# Altium PCB PCB1.PcbDoc
Units mm, origin at the board's own origin, x right, y up, seen from the top; angles counter-clockwise.
Board outline 78.99 x 58.8 mm, 2 copper layers (Top Layer, Bottom Layer); 62 components, 42 nets, 212 pads, 35 vias.
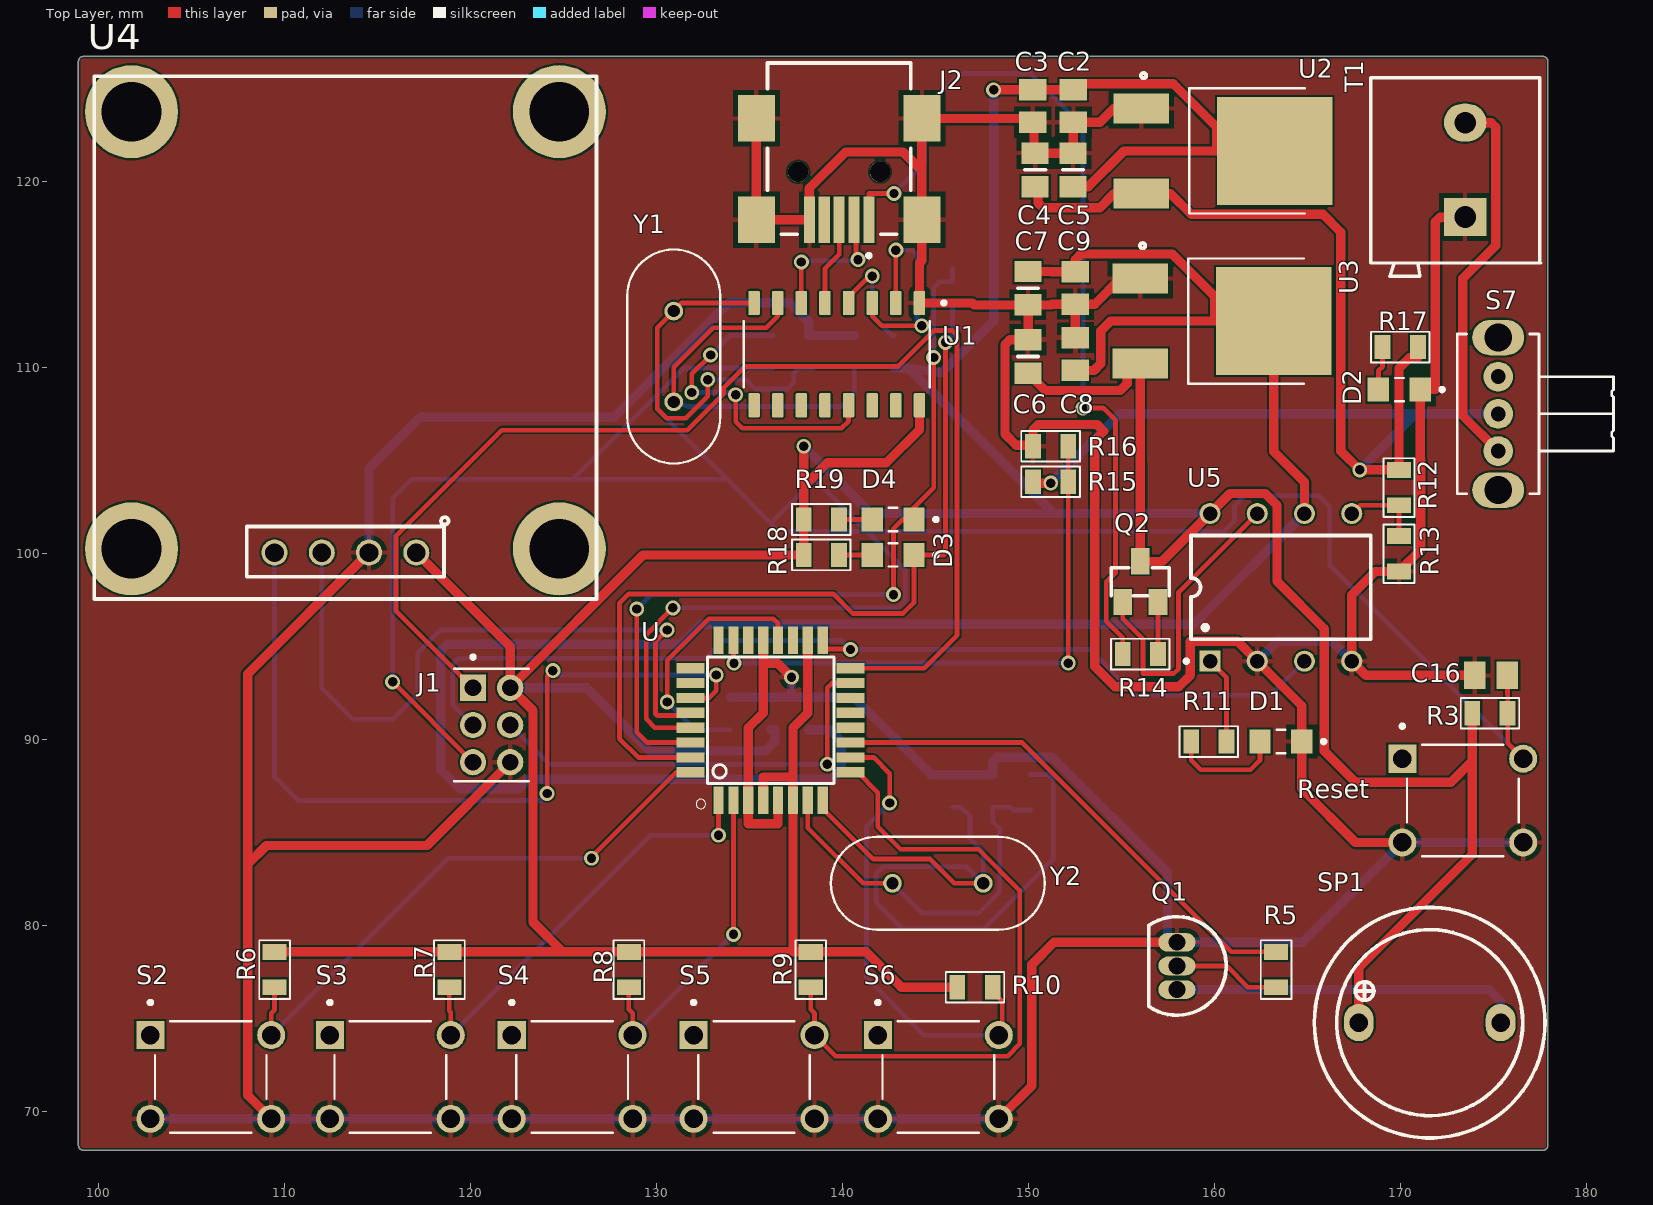
[diagram p0: Top Layer view]
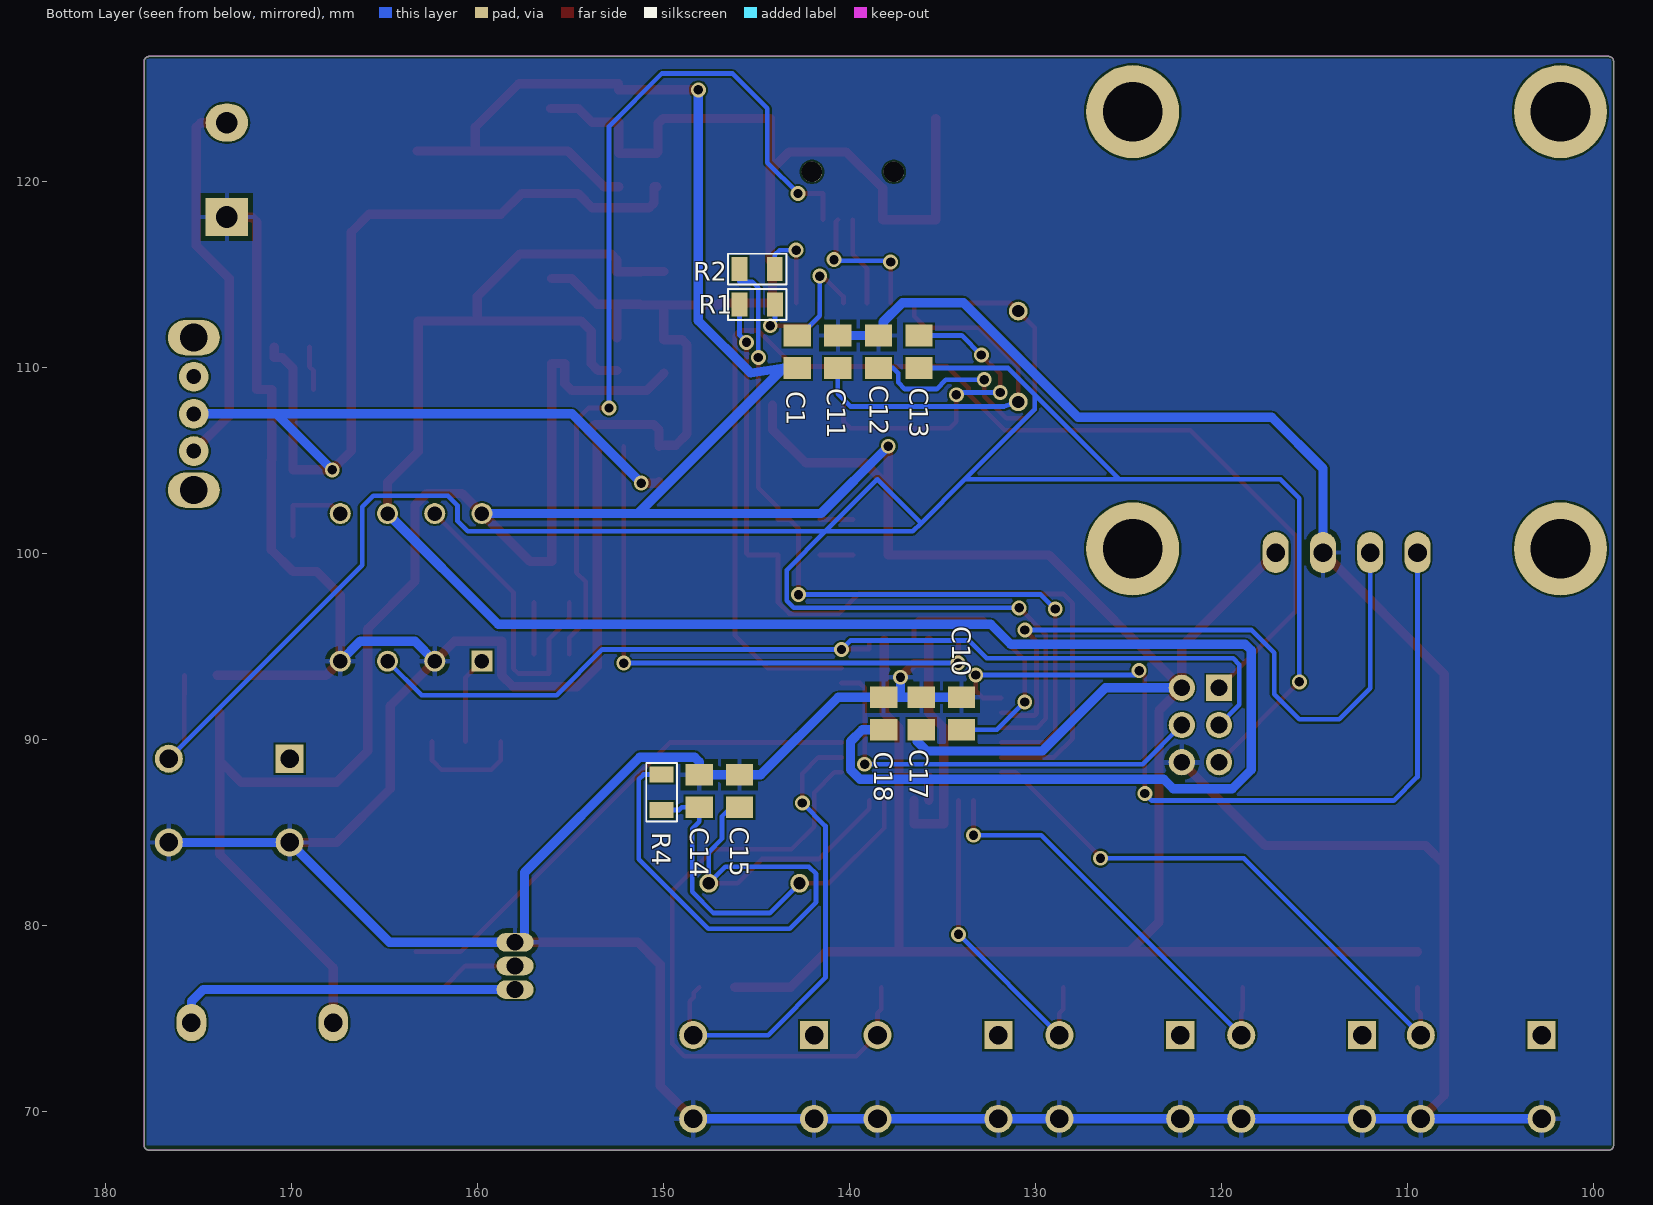
[diagram p1: Bottom Layer view, seen from below]

## Layer stack, top to bottom
Top Solder: solder mask 0.0102, Solder Resist, Dk 3.5
Top Layer: signal copper 0.0356
Dielectric 1: dielectric 0.32, FR-4, Dk 4.8
Bottom Layer: signal copper 0.0356
Bottom Solder: solder mask 0.0102, Solder Resist, Dk 3.5

## Board outline
98.933,68.199 ccw(c99.187,68.199) 99.187,67.945 177.673,67.945 ccw(c177.673,68.199) 177.927,68.199 177.927,126.492 ccw(c177.673,126.492) 177.673,126.746 99.187,126.746 ccw(c99.187,126.492) 98.933,126.492

## Design rules (kind name [scope] priority, off if disabled: settings)
Clearance [All] p1: gap=0.1 ignorepadtopadclearanceinfootprint=FALSE except(0.25: Arc-Arc Arc-Track Arc-SMDPad Arc-THPad Track-Track Track-SMDPad Track-THPad)
PolygonConnect [All] p1: connectstyle=Relief reliefconductorwidth=0.254 reliefentries=4 polygonreliefangle="90 Angle" airgapwidth=0.254
RoutingVias [All] p1: holewidth=0.5 width=0.8 viastyle="Through Hole" minholewidth=0.4 minwidth=0.7 maxholewidth=0.7 maxwidth=1
SolderMaskExpansion [All] p1: expansion=0.102 istentingtop=FALSE
Width "Schematic Width Constraint_5" [InNet('3.3V')] p1: maxlimit=0.6 minlimit=0.4 preferedwidth=0.5
Width "Schematic Width Constraint_4" [InNet('NetS7_1')] p2: maxlimit=0.6 minlimit=0.4 preferedwidth=0.5
Width "Schematic Width Constraint_3" [InNet('5V')] p3: maxlimit=0.6 minlimit=0.4 preferedwidth=0.5
Width "Schematic Width Constraint_2" [InNet('GND')] p4: maxlimit=0.6 minlimit=0.4 preferedwidth=0.5
Width "Schematic Width Constraint_1" [InNet('12V')] p5: maxlimit=0.6 minlimit=0.4 preferedwidth=0.5
Width "Schematic Width Constraint" [InNet('NetQ1_2')] p6: maxlimit=0.6 minlimit=0.4 preferedwidth=0.5
Width [All] p7: maxlimit=0.254 minlimit=0.254 preferedwidth=0.254
30 further rules are at their usual default settings.

## Classes and differential pairs
component class Power_sch: C2 C3 C4 C5 C6 C7 C8 C9 C17 C18 D1 D2 Q2 R11 R12 R13 R14 R15 R16 R17 S7 T1 U2 U3 U5
component class microcontroller_sch: C1 C10 C11 C12 C13 C14 C15 C16 D3 D4 J1 J2 Q1 R1 R2 R3 R4 R5 R6 R7 R8 R9 R10 R18 R19 Reset S2 S3 S4 S5 S6 SP1 U U1 U4 Y1 Y2

## Components (designator, comment, footprint, x,y, rotation, side; value= is the part's Value field where it differs from the comment)
C1 "100n@805" CAPC2012X95N 142.815,110.871 r270 bottom
C2 "100n@805" CAPC2012X95N 152.422,124.079 r90 top
C3 "100n@805" CAPC2012X95N 150.241,124.079 r90 top
C4 "47uF@tan size2" CAPC2012X140N 150.368,120.65 r90 top
C5 "47uF@tan size2" CAPC2012X140N 152.4,120.65 r90 top
C6 "47uF@tan size2" CAPC2012X140N 149.987,110.617 r90 top
C7 "47uF@tan size2" CAPC2012X140N 149.987,114.289 r270 top
C8 "100n@805" CAPC2012X95N 152.527,110.744 r270 top
C9 "100n@805" CAPC2012X95N 152.527,114.3 r90 top
C10 "100n@805" CAPC2012X95N 133.985,91.426 r270 bottom
C11 "22p@805" CAPC2012X95N 140.633,110.871 r270 bottom
C12 "22p@805" CAPC2012X95N 138.452,110.871 r270 bottom
C13 "100n@805" CAPC2012X95N 136.271,110.871 r270 bottom
C14 "22p@805" CAPC2012X95N 148.092,87.256 r270 bottom
C15 "22p@805" CAPC2012X95N 145.923,87.263 r270 bottom
C16 "100n@805" CAPC2012X95N 174.879,93.472 r0 top
C17 "100n@805" CAPC2012X95N 136.144,91.426 r270 bottom
C18 "100n@805" CAPC2012X95N 138.176,91.426 r270 bottom
D1 "7012X1" LED_7012X1 163.576,89.916 r180 top
D2 "7012X1" LED_7012X1 169.944,108.839 r180 top
D3 "7012X1" LED_7012X1 142.73,99.949 r180 top
D4 "7012X1" LED_7012X1 142.73,101.854 r180 top
J1 "57102-F10-03LF" AMPHENOL_57102-F10-03LF 121.142,90.805 r90 top
J2 "MUSB-05-X-B-SM-A-R-K-TR" SAMTEC_MUSB-05-X-B-SM-A-R-K-TR 139.827,121.793 r180 top
Q1 "2N2222" "2n2222 TO92" 155.829,83.947 r270 top
Q2 "MS23P01S" "IRF640N TO-220AB" 164.15,91.397 r90 top
R1 "1K" RES0805 148.655,111.098 r180 bottom
R2 "1K" RES0805 148.66,113.003 r180 bottom
R3 "10K" RES0805 178.505,93.753 r180 top
R4 "1M" RES0805 152.427,90.875 r270 bottom
R5 "1K" RES0805 165.635,73.971 r90 top
R6 "10K" RES0805 111.787,73.971 r90 top
R7 "10K" RES0805 121.185,73.971 r90 top
R8 "10K" RES0805 130.837,73.971 r90 top
R9 "10K" RES0805 140.616,73.971 r90 top
R10 "10K" RES0805 150.819,79.021 r180 top
R11 "1K" RES0805 156.018,87.603 r0 top
R12 "10K" RES0805 172.239,99.884 r90 top
R13 "10K" RES0805 172.239,96.323 r90 top
R14 "1K" RES0805 152.335,92.302 r0 top
R15 "2.2K" RES0805 154.883,106.199 r180 top
R16 "10K" RES0805 147.509,103.478 r0 top
R17 "1K" RES0805 166.305,108.812 r0 top
R18 "1K" RES0805 142.559,102.262 r180 top
R19 "1K" RES0805 142.559,104.167 r180 top
Reset "Reset" SW_TS02-66-95-BK-260-LCR-D 173.355,86.741 r0 top
S2 "TS02-66-95-BK-260-LCR-D" SW_TS02-66-95-BK-260-LCR-D 106.045,71.882 r0 top
S3 "TS02-66-95-BK-260-LCR-D" SW_TS02-66-95-BK-260-LCR-D 115.697,71.882 r0 top
S4 "TS02-66-95-BK-260-LCR-D" SW_TS02-66-95-BK-260-LCR-D 125.476,71.882 r0 top
S5 "TS02-66-95-BK-260-LCR-D" SW_TS02-66-95-BK-260-LCR-D 135.255,71.882 r0 top
S6 "TS02-66-95-BK-260-LCR-D" SW_TS02-66-95-BK-260-LCR-D 145.161,71.882 r0 top
S7 "Subminiator SPDT switch" "Subminiator SPDT switch" 155.445,145.685 r270 top
SP1 "BUZZER" "BUZZER 7.62 mm DC" 171.323,74.041 r0 top
T1 "2Pin_Terminal" 2Pin_Terminal 181.864,87.884 r90 top
U "ATMEGA328P-AN" QFP80P900X900X120-32N 136.144,91.059 r90 top
U1 "CH340G" SOIC127P600X180-16N 139.7,110.744 r270 top
U2 "NCP1117DT5" VREG_NCP1117DT33 160.147,121.666 r270 top
U3 "NCP1117DT33" VREG_NCP1117DT33 160.095,112.522 r270 top
U4 "OLED SSD1306 I2C" OLED_SSD1306_64_I2C 113.284,100.076 r180 top
U5 "LM358 DIP" "LM358 DIP" 163.576,98.204 r90 top
Y1 "12 MHZ" XTAL_HC49P488W46L1150T500H350 130.937,110.617 r90 top
Y2 "16 MHZ" XTAL_HC49P488W46L1150T500H350 145.134,82.296 r0 top

## Footprints (in the part's own frame and the unit in brackets; to place one, negate y for a bottom-side part, rotate by r counter-clockwise, add the part's x,y. Pads: shape width x height; smd on the part's side, far side on the other; paste and mask are expansions set on the pad)
"2n2222 TO92" [mm]
  oval 1x2 hole 0.9: 1(6.096,2.159) 2(7.366,2.159) 3(4.826,2.159)
  silkscreen extent 3.45,0.64 8.74,4.81, body extent 3.82,0.61 8.38,4.45, height 10.44
2Pin_Terminal [mil]
  rect 80x90 hole 46: 1(1190,330)
  oval 80x90 hole 46: 2(1390,330)
  silkscreen extent 1065,170 1485,530, body extent 1063,173 1485,530, height 493
AMPHENOL_57102-F10-03LF [mm]
  rect 1.408x1.408 hole 0.9: 01(2,1)
  round 1.408 hole 0.9: 02(2,-1) 03(0,1) 04(0,-1) 05(-2,1) 06(-2,-1)
  silkscreen extent -3.02,-2 3.75,2, body extent -3,-2 3,2, height 7.5
"BUZZER 7.62 mm DC" [mm]
  oval 1.6x2 hole 1: 1(-3.556,0.762) 2(4.064,0.762)
  silkscreen extent -5.95,-5.43 6.45,6.96, body extent -5.75,-5.23 6.25,6.76, height 9.5
CAPC2012X95N [mm]
  rect 1.16x1.47 smd: 1(-0.875,0) 2(0.875,0)
  body extent -1,-0.63 1,0.63, height 1.45
CAPC2012X140N [mm]
  rect 1.15x1.45 smd: 1(-0.9,0) 2(0.9,0)
  silkscreen extent 0,-0.55 0,0.55, body extent -1.02,-0.65 1.02,0.65, height 1.2
"IRF640N TO-220AB" [mm]
  rect 1.4x1 smd paste+0 mask+0: 1(6.012,9.078) 2(6.012,7.178) 3(8.212,8.128)
  silkscreen extent 6.35,6.57 7.86,9.69, body extent 5.21,6.47 9.01,9.79, height 0.25
LED_7012X1 [mm]
  rect 1.15x1.3 smd: A(1.125,0) C(-1.125,0)
  silkscreen extent -2.4,-0.62 0.23,0.62, body extent -1,-0.62 1,0.62, height 0.73
"LM358 DIP" [mm]
  rect 1.13x1.13 hole 0.78: 1(-3.97,3.81)
  round 1.13 hole 0.78: 2(-3.97,1.27) 3(-3.97,-1.27) 4(-3.97,-3.81) 5(3.97,-3.81) 6(3.97,-1.27) 7(3.97,1.27) 8(3.97,3.81)
  silkscreen extent -4.07,-4.83 2.79,5.18, body extent -3.94,-4.7 3.94,4.7, height 4.36
OLED_SSD1306_64_I2C [mm] "OLED SS1306 Breakout, 128X64, I2C (Make www.pcblearn.com)"
  round 1.4 / inner round 1.4 / far side oval 1.4x2.2 hole 1 mask+0.1: 1(-3.81,0) 2(-1.27,0) 3(1.27,0) 4(3.81,0)
  round 5 hole 3.2: ""(-11.5,-0.2) ""(-11.5,-23.7) ""(11.5,-0.2) ""(11.5,-23.7)
  silkscreen extent -13.5,-25.6 13.5,2.5, body extent -13.37,-25.49 13.34,2.37, height 11.47
QFP80P900X900X120-32N [mm]
  rect 1.5x0.55 smd: 1(-4.3,2.8) 2(-4.3,2) 3(-4.3,1.2) 4(-4.3,0.4) 5(-4.3,-0.4) 6(-4.3,-1.2) 7(-4.3,-2) 8(-4.3,-2.8) 17(4.3,-2.8) 18(4.3,-2) 19(4.3,-1.2) 20(4.3,-0.4) 21(4.3,0.4) 22(4.3,1.2) 23(4.3,2) 24(4.3,2.8)
  rect 0.55x1.5 smd: 9(-2.8,-4.3) 10(-2,-4.3) 11(-1.2,-4.3) 12(-0.4,-4.3) 13(0.4,-4.3) 14(1.2,-4.3) 15(2,-4.3) 16(2.8,-4.3) 25(2.8,4.3) 26(2,4.3) 27(1.2,4.3) 28(0.4,4.3) 29(-0.4,4.3) 30(-1.2,4.3) 31(-2,4.3) 32(-2.8,4.3)
  silkscreen extent -4.75,-3.4 3.4,4, body extent -4.5,-4.5 4.5,4.5, height 1.2
RES0805 [mm]
  rect 0.85x1.3 smd: 1(2.737,2.313) 2(4.637,2.313)
  silkscreen extent 2.11,1.49 5.26,3.14, body extent 2.66,1.66 4.71,2.96, height 0.5
SAMTEC_MUSB-05-X-B-SM-A-R-K-TR [mm]
  rect 0.6x2.5 smd: 1(-1.6,3.83) 2(-0.8,3.83) 3(0,3.83) 4(0.8,3.83) 5(1.6,3.83)
  rect 2x2.5 smd: SH1(-4.45,3.83) SH2(4.45,3.83) SH3(-4.45,-1.62) SH4(4.45,-1.62)
  round 1.1 hole 1.1 unplated: ""(-2.2,1.25) ""(2.2,1.25)
  silkscreen extent -3.85,-4.6 3.85,5.85, body extent -5,-4.6 5,4.9, height 4.13
SOIC127P600X180-16N [mm]
  rrect25% 1.31x0.62 smd: 1(-2.75,4.445) 2(-2.75,3.175) 3(-2.75,1.905) 4(-2.75,0.635) 5(-2.75,-0.635) 6(-2.75,-1.905) 7(-2.75,-3.175) 8(-2.75,-4.445) 9(2.75,-4.445) 10(2.75,-3.175) 11(2.75,-1.905) 12(2.75,-0.635) 13(2.75,0.635) 14(2.75,1.905) 15(2.75,3.175) 16(2.75,4.445)
  silkscreen extent -2.85,-5 1.78,5.85, body extent -3,-5 3,5, height 1.8
"Subminiator SPDT switch" [mm]
  round 1.6 hole 0.8: 1(40.152,19.815) 2(38.152,19.815) 3(36.152,19.815)
  oval 1.9x2.8 hole 1.5: M2(34.052,19.815) M2(42.252,19.815)
  silkscreen extent 33.85,17.62 42.45,26.01, body extent 33.84,17.54 42.45,25.91, height 4.7
SW_TS02-66-95-BK-260-LCR-D [mm]
  rect 1.508x1.508 / inner round 1.508 / far side rect 1.508x1.508 hole 1: 1(-3.25,2.25)
  round 1.508 hole 1: 2(3.25,2.25) 3(-3.25,-2.25) 4(3.25,-2.25)
  silkscreen extent -3.35,-3 3,4.1, body extent -3.95,-3 3.94,3, height 9.7
VREG_NCP1117DT33 [mm]
  rect 1.6x3 smd: 1(-2.285,-4.08) 3(2.285,-4.08)
  rect 5.8x6.2 smd: 4(0,3.1)
  silkscreen extent -4.19,-4.09 3.36,4.72, body extent -3.12,-4.7 3.38,5.21, height 2.39
XTAL_HC49P488W46L1150T500H350 [mm]
  round 1.007 hole 0.657: 1(-2.44,0) 2(2.44,0)
  silkscreen extent -5.75,-2.5 5.75,2.5, body extent -5.66,-2.5 5.84,2.5, height 3.25

## Part data
C1 C2 C3 C8 C9 C10 C11 C12 C13 C14 C15 C16 C17 C18: library part AC0805KPX7R9BB103, "Multilayer Ceramic Capacitors MLCC - SMD/SMT 50Vol 0.01uF X7R 805 10% AEC-Q200", Package="0805 Yageo", Check_prices=https://www.snapeda.com/parts/AC0805KPX7R9BB103/Yageo/view-part/?ref=eda, MF=YAGEO, MP=AC0805KPX7R9BB103, SnapEDA_Link=https://www.snapeda.com/parts/AC0805KPX7R9BB103/Yageo/view-part/?ref=snap
C4 C5 C6 C7: library part TLJR476M010S3200, "Tantalum Capacitors", Package="0805 AVX", Availability=Unavailable, Check_prices=https://www.snapeda.com/parts/TLJR476M010S3200/AVX/view-part/1709907/?ref=eda, MF=AVX, MP=TLJR476M010S3200, Price=None, SnapEDA_Link=https://www.snapeda.com/parts/TLJR476M010S3200/AVX/view-part/1709907/?ref=snap
D1 D2 D3 D4: "Red - LED Indication - Discrete 1.7V 0805 (2012 Metric)", Package="0805 Visual Communications", Availability="In Stock", Check_prices=https://www.snapeda.com/parts/7012X1/Visual+Communications/view-part/?ref=eda, MF=VCC, MP=7012X1, Price=None, Purchase-URL=https://pricing.snapeda.com/search/part/7012X1/?ref=eda, SnapEDA_Link=https://www.snapeda.com/parts/7012X1/Visual+Communications/view-part/?ref=snap
J1: "Header, Through Hole, Double row, 6, 2mm (0.079in), Vertical", Package=None, Availability="In Stock", Check_prices=https://www.snapeda.com/parts/57102-F10-03LF/Amphenol+FCI/view-part/?ref=eda, MF="Amphenol ICC (FCI)", MP=57102-F10-03LF, Price=None, Purchase-URL=https://pricing.snapeda.com/search/part/57102-F10-03LF/?ref=eda, SnapEDA_Link=https://www.snapeda.com/parts/57102-F10-03LF/Amphenol+FCI/view-part/?ref=snap
J2: "USB - mini B USB 2.0 Receptacle Connector 5 Position Surface Mount, Right Angle", Package=None, Check_prices=https://www.snapeda.com/parts/MUSB-05-F-B-SM-A-R-K-TR/Samtec/view-part/?ref=eda, MF=Samtec, MP=MUSB-05-F-B-SM-A-R-K-TR, SnapEDA_Link=https://www.snapeda.com/parts/MUSB-05-F-B-SM-A-R-K-TR/Samtec/view-part/?ref=snap
Q1: "npn"
Q2: library part IRF640N
R1 R2 R3 R4 R5 R6 R7 R8 R9 R10 R11 R12 R13 R15 R16 R17 R18 R19: library part RES0805, "RES0805"
R14: library part RES1206, "RES1206"
Reset: library part TS02-66-95-BK-260-LCR-D, Package=None, Availability=Unavailable, MP=TS02-66-95-BK-260-LCR-D, Price=None
S2 S3 S4 S5 S6: Package=None, Availability=Unavailable, MP=TS02-66-95-BK-260-LCR-D, Price=None
U: "AVR AVRÂ® ATmega Microcontroller IC 8-Bit 20MHz 32KB _16K x 16_ FLASH 32-TQFP _7x7_", Package="TQFP-32 Microchip", Availability=Unavailable, MF=Microchip, MP=ATMEGA328P-AN, Price=None, SnapEDA_Link=https://www.snapeda.com/parts/ATMEGA328P-AN/Microchip/view-part/1227245/?ref=snap
U1: "USB Interface Integrated Circuit", Package=None, Availability="Not in stock", Check_prices=https://www.snapeda.com/parts/Ch340G/WCH/view-part/?ref=eda, MF=WCH, MP=Ch340G, Price=None, SnapEDA_Link=https://www.snapeda.com/parts/Ch340G/WCH/view-part/?ref=snap
U2: library part NCP1117DT33, "Linear Voltage Regulator IC Positive Fixed 1 Output 1A DPAK", Package="DPAK-3 ON Semiconductor", Availability="In Stock", Check_prices=https://www.snapeda.com/parts/NCP1117DT33/Onsemi/view-part/?ref=eda, MF="ON Semiconductor", MP=NCP1117DT33, Price=None, Purchase-URL=https://pricing.snapeda.com/search/part/NCP1117DT33/?ref=eda, SnapEDA_Link=https://www.snapeda.com/parts/NCP1117DT33/Onsemi/view-part/?ref=snap
U3: "Linear Voltage Regulator IC Positive Fixed 1 Output 1A DPAK", Package="DPAK-3 ON Semiconductor", Availability="In Stock", Check_prices=https://www.snapeda.com/parts/NCP1117DT33/Onsemi/view-part/?ref=eda, MF="ON Semiconductor", MP=NCP1117DT33, Price=None, Purchase-URL=https://pricing.snapeda.com/search/part/NCP1117DT33/?ref=eda, SnapEDA_Link=https://www.snapeda.com/parts/NCP1117DT33/Onsemi/view-part/?ref=snap
U4: "OLED, SSD1306, 0.96\", 128X64, BREAKOUT I2C", ComponentLink2Description="WebSite: pcblearn", ComponentLink2URL=www.pcblearn.com, DatasheetVersion=2022
U5: "Dual Operational Amplifiers", Package="PDIP-8 Texas Instruments", Arrow_Electronics-Purchase-URL=https://snapeda.com/shop?store=Arrow+Electronics&id=559457, Availability=Unavailable, DigiKey-Purchase-URL=https://snapeda.com/shop?store=DigiKey&id=559457, MF="Texas Instruments", Mouser-Purchase-URL=https://snapeda.com/shop?store=Mouser&id=559457, MP=LM358P, Price=None, SnapEDA_Link=https://www.snapeda.com/parts/LM358P/Texas%20Instruments/view-part/559457/?ref=snap, Texas_Instruments-Purchase-URL=https://snapeda.com/shop?store=Texas+Instruments&id=559457
Y1 Y2: library part ABL-22.1184MHZ-B2, "HC/49US (AT49) MICROPROCESSOR CRYSTAL", Package="HC-49/US ABRACON", Availability="In Stock", Check_prices=https://www.snapeda.com/parts/ABL-22.1184MHZ-B2/Abracon+LLC/view-part/?ref=eda, MF="Abracon LLC", MP=ABL-22.1184MHZ-B2, Price=None, Purchase-URL=https://pricing.snapeda.com/search/part/ABL-22.1184MHZ-B2/?ref=eda, SnapEDA_Link=https://www.snapeda.com/parts/ABL-22.1184MHZ-B2/Abracon+LLC/view-part/?ref=snap

## Via types
v1: diameter 0.8, hole 0.5, Top Layer to Bottom Layer, 35 vias

## Nets (pads, with @x,y where several pads share a name; then routed paths per layer and width w, separated by ;. In a path a pad name is that pad's centre, name@x,y a point inside that pad or via, vN(x,y) a via of type N, cw(c..) or ccw(c..) an arc to the next point about the centre after c; other vN are vias at no path point)
3.3V: C7.1 C8.2 C9.2 C18.2 U3.4 U5.6 | length 118.8
  Top Layer w0.5: C7.1 151.232,115.189 151.246,115.175 C9.2 152.527,115.824 152.832,116.129 157.734,116.129 160.02,113.843 160.02,112.522 ; C8.2 153.532,109.869 153.899,110.236 153.899,111.989 154.432,112.522 160.02,112.522 ; U5.6 164.846,103.861 163.195,105.512 U3.4 160.02,112.522
  Bottom Layer w0.5: C18.2 139.319,90.551 139.954,89.916 139.954,88.392 139.446,87.884 123.114,87.884 122.606,87.376 119.431,87.376 118.415,88.392 118.415,94.818 118.745,95.148 131.343,95.148 132.41,96.215 158.887,96.215 U5.6
5V: C1.2 C2.2 C3.2 C5.1 C6.1 C17.2 J1.02 Q2.3 R3.2 R6.2 R7.2 R8.2 R9.2 R10.2 R18.2 R19.2 SP1.1 U1.16 U2.4 U3.3 U4.1 U5.8 U.4 U.6 U.18 | length 281.8
  Top Layer w0.5: R6.2 R7.2 124.968,78.608 ; U4.1 122.142,95.028 J1.02 ; U.4 135.744,88.011 137.344,88.011 ; v1(137.922,105.791) 137.922,103.632 ; U.18 138.144,91.453 137.344,90.653 137.344,88.011 ; U1.16 144.145,106.68 142.367,104.902 139.192,104.902 137.922,103.632 ; R10.2 143.175,76.708 141.275,78.608 R9.2 137.49,78.608 ; v1(148.133,124.954) C3.2 C2.2 152.422,125.273 157.785,125.273 160.122,122.936 160.122,121.666 ; C6.1 150.916,108.788 154.94,108.788 155.321,109.169 155.321,110.237 U3.3 156.015,104.909 156.022,104.902 Q2.3 156.022,99.593 157.185,99.593 U5.8 160.843,103.251 162.738,103.251 163.373,102.616 163.373,98.527 165.913,95.987 165.913,89.408 167.589,87.732 172.72,87.732 173.868,88.88 ; C5.1 153.227,119.75 155.143,121.666 160.122,121.666 ; U2.4 160.122,121.666 ; SP1.1 167.767,77.749 173.868,83.85 173.868,88.88 ; R3.2 173.868,88.88 ; J1.02 129.286,99.949 R18.2 R19.2 137.922,103.632 ; J1.02 123.368,91.579 123.368,80.208 124.968,78.608 ; 124.968,78.608 R8.2 137.49,78.608 ; 137.344,88.011 U.6 137.344,78.754 137.49,78.608
  Bottom Layer w0.5: J1.02 126.245,92.805 129.642,89.408 135.853,89.408 136.361,89.916 136.361,90.551 C17.2 ; v1(137.922,105.791) 141.539,102.174 151.384,102.174 ; C1.2 143.562,109.996 ; v1(148.133,124.954) 148.133,112.546 145.315,109.728 143.562,109.996 ; U5.8 151.384,102.174 ; 143.562,109.996 151.384,102.174
12V: C4.1 R12.2 R15.2 R17.2 S7.2 U2.3 | length 72.1
  Top Layer w0.5: R15.2 150.246,103.81 v1(151.206,103.81) ; C4.1 150.52,119.75 150.52,118.872 150.774,118.618 153.847,118.618 154.61,119.381 U2.3 157.632,119.381 158.751,118.262 165.837,118.262 166.802,117.297 166.802,105.537 v1(167.818,104.521) R12.2 169.926,109.982 170.51,110.566 170.942,110.566 R17.2
  Bottom Layer w0.5: v1(151.206,103.81) 154.929,107.533 170.83,107.533 ; v1(167.818,104.521) 170.83,107.533 ; S7.2 170.83,107.533
ADC: R15.1 R16.2 U.23 | length 30.9
  Top Layer w0.254: U.23 134.144,94.164 v1(134.176,94.132) ; v1(152.146,94.132) R15.1 R16.2
  Bottom Layer w0.254: v1(134.176,94.132) v1(152.146,94.132)
Buzzer: R5.2 U.11 | length 27.5
  Top Layer w0.254: U.11 149.663,89.859 160.914,78.608 R5.2
D+: J2.3 U1.5 | length 4.8
  Top Layer w0.254: U1.5 139.065,115.341 139.827,116.103 J2.3
D-: J2.2 U1.6 | length 7.6
  Top Layer w0.254: U1.6 137.795,115.443 137.773,115.465 137.773,115.675 v1(137.795,115.697) ; J2.2 140.739,117.851 140.739,115.928 v1(140.843,115.824)
  Bottom Layer w0.254: v1(137.795,115.697) 137.858,115.76 140.779,115.76 v1(140.843,115.824)
GND: C2.1 C3.1 C4.2 C5.2 C6.2 C7.2 C8.1 C9.1 C10.1 C11.1 C12.1 C14.1 C15.1 C16.1 C17.1 C18.1 D1.C D2.C J1.06 J2.5 J2.SH1 J2.SH2 J2.SH3 J2.SH4 Q1.3 R13.1 R16.1 Reset.3 Reset.4 S2.3 S2.4 S3.3 S3.4 S4.3 S4.4 S5.3 S5.4 S6.3 S6.4 T1.1 U1.1 U2.1 U3.1 U4.2 U5.2 U5.4 U.3 U.5 U.21 | length 370.2
  Top Layer w0.5: S2.4 108.026,70.901 108.026,83.312 ; U4.2 108.026,93.548 108.026,83.312 ; J1.06 117.665,84.328 109.042,84.328 108.026,83.312 ; J2.SH4 J2.SH2 J2.5 138.227,119.658 140.184,121.615 143.256,121.615 144.277,120.594 ; U.21 135.744,94.107 ; U.5 136.544,85.496 134.944,85.496 U.3 134.944,90.653 135.744,91.453 135.744,94.107 ; v1(137.262,93.37) 136.525,94.107 135.744,94.107 ; S6.4 150.19,71.411 150.19,77.927 151.384,79.121 Q1.3 ; R16.1 R16.1@150.246,105.842 ; C8.1 C9.1 ; U3.1 154.95,114.807 153.568,113.425 C9.1 ; U2.1 154.595,123.951 153.848,123.204 C2.1 152.411,123.193 152.411,121.561 C5.2 C4.2 150.304,121.614 150.304,123.141 150.032,123.413 J2.SH3 144.277,120.594 ; Reset.3 167.586,84.491 164.701,87.376 D1.C 164.701,91.839 U5.2 161.239,95.301 158.701,95.301 158.701,93.472 158.091,92.862 154.661,92.862 153.568,93.955 153.568,106.121 154.051,106.604 153.695,106.959 150.525,106.959 150.246,106.68 R16.1@150.246,105.842 ; T1.1 172.136,118.11 171.882,117.856 171.882,108.839 D2.C 171.069,105.08 171.094,105.054 171.094,100.228 R13.1 168.656,99.06 167.386,97.79 U5.4 168.148,93.472 C16.1 ; 144.277,120.594 J2.SH1 144.277,115.778 144.145,115.646 U1.1 146.99,113.494 147.095,113.389 C7.2 ; C7.2 C6.2 149.007,111.517 148.742,111.252 148.742,106.451 149.352,105.842 R16.1@150.246,105.842 ; C7.2 151.232,113.389 151.268,113.425 C9.1
  Bottom Layer w0.5: S2.3 S2.4 S3.3 S3.4 S4.3 S4.4 S5.3 S5.4 S6.3 S6.4 ; U4.2 114.554,104.597 117.311,107.354 127.725,107.354 133.883,113.513 137.16,113.513 138.201,112.471 138.201,111.746 C12.1 C11.1 ; C10.1 C17.1 137.262,92.301 ; v1(137.262,93.37) 137.262,92.301 ; C14.1 C14.1@148.082,88.131 ; U5.2 163.373,95.301 166.319,95.301 U5.4 ; Reset.4 Reset.3 164.735,79.121 Q1.3 157.48,79.121 157.48,82.88 151.282,89.078 148.336,89.078 148.082,88.824 C14.1@148.082,88.131 ; 137.262,92.301 C18.1 140.617,92.301 144.78,88.138 C15.1 146.99,88.138 146.996,88.131 C14.1@148.082,88.131
MISO: J1.01 U.16 | length 67.5
  Top Layer w0.254: J1.01 116.002,96.945 116.002,100.965 121.691,106.655 131.65,106.655 133.615,108.62 133.615,108.925 134.772,110.082 143.001,110.082 144.934,112.015 145.914,112.015 146.169,111.76 146.169,95.623 144.405,93.859 U.16
MOSI: J1.04 U.15 | length 23.4
  Top Layer w0.254: v1(139.192,88.697) 139.192,92.805 139.446,93.059 U.15
  Bottom Layer w0.254: J1.04 124.25,88.697 v1(139.192,88.697)
NetC1_1: C1.1 U1.4 | length 5.8
  Top Layer w0.254: U1.4 140.335,113.839 141.327,114.831 141.501,114.831 v1(141.605,114.935)
  Bottom Layer w0.254: v1(141.605,114.935) 141.605,112.801 142.66,111.746 C1.1
NetC10_2: C10.2 U.20 | length 14.2
  Top Layer w0.254: v1(130.586,92.045) 130.586,94.29 132.817,96.52 136.29,96.52 136.544,96.266 U.20
  Bottom Layer w0.254: v1(130.586,92.045) 132.08,90.551 C10.2
NetC11_2: C11.2 U1.7 Y1.1 | length 20.7
  Top Layer w0.254: Y1.1 130.937,110.035 133.068,112.166 135.915,112.166 136.525,112.776 U1.7
  Bottom Layer w0.254: Y1.1 131.683,107.933 139.962,107.933 140.64,108.61 140.64,109.996 C11.2
NetC12_2: C12.2 U1.8 Y1.2 | length 21.1
  Top Layer w0.254: v1(132.766,109.372) 132.766,108.483 131.572,107.29 130.556,107.29 130.048,107.798 130.048,112.168 Y1.2 131.374,113.494 U1.8
  Bottom Layer w0.254: v1(132.766,109.372) 134.822,109.372 135.33,108.864 137.033,108.864 137.389,109.22 137.389,109.728 137.657,109.996 C12.2
NetC13_1: C13.1 U1.13 | length 17.3
  Top Layer w0.254: v1(131.902,108.681) 131.902,109.677 v1(132.918,110.693) ; v1(134.264,108.56) 134.264,107.112 134.62,106.756 139.954,106.756 140.335,107.137 U1.13
  Bottom Layer w0.254: v1(131.902,108.681) 134.143,108.681 v1(134.264,108.56) ; v1(132.918,110.693) 133.971,111.746 C13.1
NetD1_A: D1.A R11.1 | length 6.1
  Top Layer w0.254: R11.1 158.755,88.9 159.263,88.392 161.943,88.392 162.451,88.9 D1.A
NetD2_A: D2.A R17.1 | length 2.4
  Top Layer w0.254: D2.A 168.819,109.855 169.042,110.078 R17.1
NetD3_A: D3.A R18.1 | length 1.8
  Top Layer w0.254: R18.1 D3.A
NetD4_A: D4.A R19.1 | length 1.8
  Top Layer w0.254: R19.1 D4.A
NetQ1_1: Q1.1 R5.1 | length 5.8
  Top Layer w0.254: Q1.1 160.655,77.851 161.798,76.708 R5.1
NetQ1_2: Q1.2 SP1.2 | length 18.8
  Bottom Layer w0.5: Q1.2 174.752,76.581 175.387,75.946 SP1.2
NetQ2_1: Q2.1 U5.7 | length 16.4
  Top Layer w0.254: Q2.1 155.072,96.52 156.159,95.433 156.159,93.574 157.81,93.574 158.074,93.837 158.074,97.942 U5.7
NetQ2_2: Q2.2 R14.2 | length 2.8
  Top Layer w0.254: R14.2 Q2.2
NetR1_2: R1.2 U1.3 | length 4.8
  Top Layer w0.254: U1.3 141.605,112.776 142.113,112.268 v1(144.272,112.268)
  Bottom Layer w0.254: R1.2 144.018,112.522 v1(144.272,112.268)
NetR2_2: R2.2 U1.2 | length 4.9
  Top Layer w0.254: U1.2 v1(142.875,116.332)
  Bottom Layer w0.254: v1(142.875,116.332) 143.769,116.332 144.023,116.078 R2.2
NetR11_2: R11.2 U5.1 | length 4.7
  Top Layer w0.254: U5.1 160.655,93.345 R11.2
NetR12_1: R12.1 R13.2 U5.5 | length 4.4
  Top Layer w0.254: U5.5 167.833,102.621 R12.1 R13.2
NetS7_1: S7.1 T1.2 | length 20.7
  Top Layer w0.5: T1.2 174.879,123.19 175.133,122.936 175.133,116.586 173.355,114.808 173.355,107.438 S7.1
PB_1: R6.1 S2.2 U.32 | length 31.1
  Top Layer w0.254: S2.2 109.295,75.311 109.474,75.49 R6.1 ; v1(126.517,83.642) 126.517,83.712 131.064,88.259 U.32
  Bottom Layer w0.254: S2.2 118.805,83.642 v1(126.517,83.642)
PB_2: R7.1 S3.2 U.1 | length 23.3
  Top Layer w0.254: R7.1 118.872,75.437 118.947,75.362 S3.2 ; v1(133.344,84.881) U.1
  Bottom Layer w0.254: S3.2 129.696,84.881 v1(133.344,84.881)
PB_3: R8.1 S4.2 U.2 | length 17.5
  Top Layer w0.254: R8.1 128.524,75.513 128.726,75.311 S4.2 ; v1(134.144,79.55) U.2
  Bottom Layer w0.254: S4.2 v1(134.144,79.55)
PB_4: R9.1 S5.2 U.9 | length 35.5
  Top Layer w0.254: R9.1 138.303,75.513 138.505,75.311 S5.2 139.637,73 148.882,73 149.542,73.66 149.542,81.903 147.32,84.125 143.126,84.125 141.907,85.344 141.907,87.175 140.824,88.259 U.9
PB_5: R10.1 S6.2 U.10 | length 25.2
  Top Layer w0.254: U.10 141.681,89.059 142.545,88.195 v1(142.545,86.614) ; R10.1 148.38,76.41 148.38,76.156 148.59,75.946 148.59,74.311 S6.2
  Bottom Layer w0.254: v1(142.545,86.614) 141.3,85.369 141.3,77.216 144.384,74.132 S6.2
Reset: C13.2 C16.2 J1.05 R3.1 Reset.2 U.29 | length 145.2
  Top Layer w0.254: v1(115.824,93.123) J1.05 ; v1(130.886,97.104) 129.45,95.668 129.45,91.135 129.926,90.659 U.29 ; C16.2 175.754,92.445 175.768,92.431 R3.1 175.768,89.828 Reset.2
  Bottom Layer w0.254: v1(115.824,93.123) 115.824,102.997 116.84,104.013 125.501,104.013 ; v1(130.886,97.104) 143.002,97.104 143.383,97.485 143.383,99.136 141.3,101.219 ; C13.2 133.389,109.999 131.488,109.999 130.048,108.56 ; Reset.2 166.203,99.393 166.203,102.529 165.608,103.124 161.595,103.124 161.087,102.616 161.087,101.778 160.528,101.219 141.3,101.219 ; 125.501,104.013 130.048,108.56 ; 125.501,104.013 133.807,104.013 ; 130.048,108.56 130.048,107.772 133.807,104.013 ; 133.807,104.013 136.157,101.663 ; 136.157,101.663 136.601,101.219 141.3,101.219 ; 136.157,101.663 138.506,104.013 141.3,101.219
RXD: D4.C R2.1 U.30 | length 43.4
  Top Layer w0.254: v1(128.946,97.038) 128.946,90.415 129.502,89.859 U.30 ; v1(142.748,97.815) 142.748,101.346 143.256,101.854 D4.C 143.855,102.504 144.907,103.556 v1(144.907,110.566)
  Bottom Layer w0.254: v1(128.946,97.038) 129.724,97.815 v1(142.748,97.815) ; v1(144.907,110.566) 144.907,114.3 145.237,114.63 145.923,114.63 R2.1
SCK: J1.03 U5.3 U.17 | length 54
  Top Layer w0.254: U.17 138.944,94.894 140.411,94.894 v1(140.437,94.869)
  Bottom Layer w0.254: J1.03 119.05,91.897 119.05,94.056 119.38,94.386 132.639,94.386 133.604,95.352 139.954,95.352 v1(140.437,94.869) 153.289,94.869 155.753,92.405 163.017,92.405 U5.3
SCL: U4.3 U.28 | length 36.7
  Top Layer w0.254: v1(130.581,95.91) 129.954,95.283 129.954,91.415 130.056,91.313 131.369,91.313 131.369,91.459 U.28
  Bottom Layer w0.254: U4.3 112.014,92.786 113.69,91.11 115.824,91.11 117.17,92.456 117.17,94.691 118.389,95.91 v1(130.581,95.91)
SDA: U4.4 U.27 | length 45.4
  Top Layer w0.254: v1(124.13,87.122) 124.13,93.421 v1(124.435,93.726) ; U.27 132.842,92.259 133.223,92.64 v1(133.223,93.497)
  Bottom Layer w0.254: U4.4 109.474,88.011 110.744,86.741 123.749,86.741 v1(124.13,87.122) ; v1(124.435,93.726) 124.663,93.497 v1(133.223,93.497)
TXD: D3.C R1.1 U.31 | length 46.1
  Top Layer w0.254: U.31 129.032,89.059 128.016,90.075 128.016,97.341 128.524,97.849 139.514,97.849 140.564,96.799 143.256,96.799 143.855,97.398 D3.C 145.466,99.949 145.542,100.025 v1(145.542,111.379)
  Bottom Layer w0.254: v1(145.542,111.379) 145.918,111.755 R1.1
VBus: J2.1 R14.1 | length 48.8
  Top Layer w0.254: J2.1 141.427,119.38 v1(142.773,119.38) ; v1(152.933,107.848) 154.026,107.848 154.686,107.188 154.686,98.992 154.195,98.501 154.195,96.381 155.072,95.504 R14.1
  Bottom Layer w0.254: v1(142.773,119.38) 144.424,121.031 144.424,123.952 146.304,125.832 150.089,125.832 152.933,122.987 v1(152.933,107.848)
X1_In: C14.2 R4.2 U.7 Y2.1 | length 21
  Top Layer w0.254: U.7 138.144,85.268 141.116,82.296 Y2.1
  Bottom Layer w0.254: Y2.1 144.294,80.696 147.32,80.696 148.463,81.839 148.463,85.217 148.082,85.598 148.082,86.381 C14.2 149.022,86.381 149.165,86.238 R4.2
X1_Out: C15.2 R4.1 U.8 Y2.2 | length 40.9
  Top Layer w0.254: U.8 138.944,86.309 141.658,83.595 144.725,83.595 146.025,82.296 Y2.2
  Bottom Layer w0.254: C15.2 146.378,86.388 146.863,85.903 146.863,84.684 147.574,83.972 Y2.2 146.685,83.185 142.189,83.185 141.808,82.804 141.808,81.28 143.231,79.858 147.599,79.858 151.333,83.591 151.333,87.884 151.079,88.138 R4.1
pads on no net: J2. J2.4 Reset.1 S2.1 S3.1 S4.1 S5.1 S6.1 S7.3 S7.M2 U1.9 U1.10 U1.11 U1.12 U1.14 U1.15 U4. U.12 U.13 U.14 U.19 U.22 U.24 U.25 U.26

## Polygon pours and split planes (outlines as drawn)
GND on Top Layer "GND_L01_P000" (solid, pour order 0): 98.933,126.746 98.806,126.619 98.806,68.072 178.054,68.072 177.927,68.199 177.927,126.873 98.679,126.873 98.552,127
GND on Bottom Layer "GND_L02_P001" (solid, pour order 1): 99.06,126.619 98.806,126.365 98.806,68.199 177.927,68.199 177.8,68.326 177.8,126.746 99.06,126.746 98.933,126.619

## Keep-outs
Keep-Out Layer:
  the board outline again, w0.01